# Altium PCB FPOSINDC3.PcbDoc
Units mm, origin at the board's own origin, x right, y up, seen from the top; angles counter-clockwise.
Board outline 70 x 42 mm, 2 copper layers (Top Layer, Bottom Layer), stack 1.571 mm thick; 68 components, 70 nets, 288 pads, 38 vias.
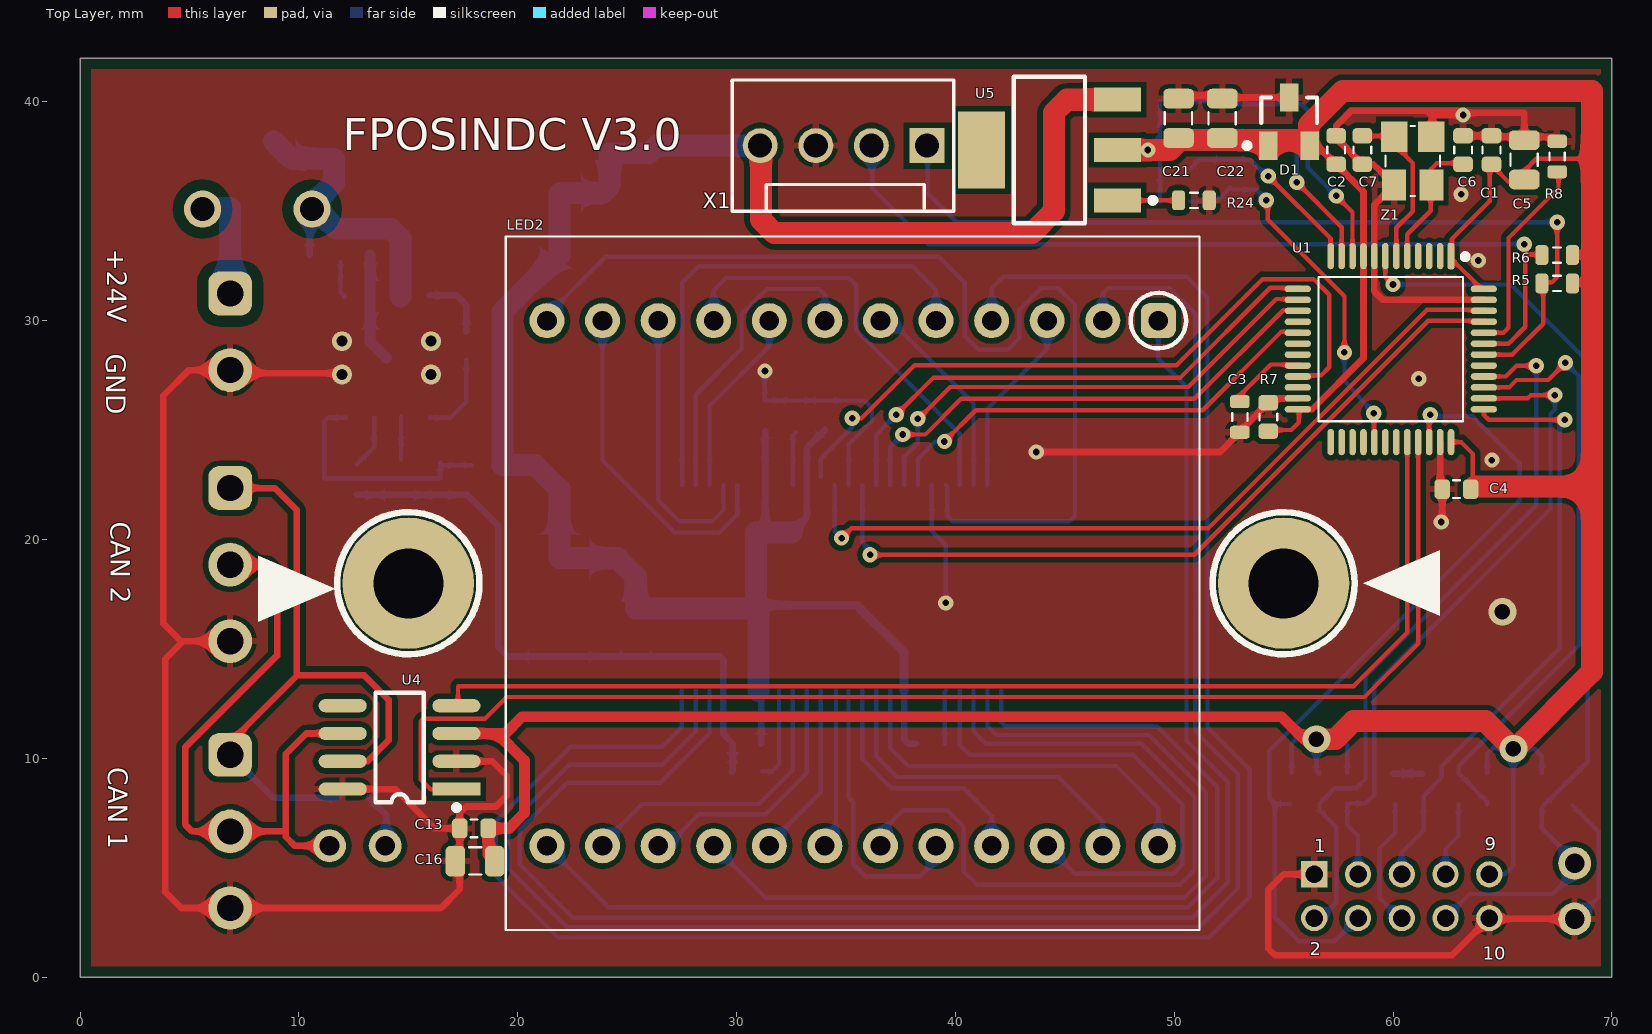
[diagram p0: Top Layer view]
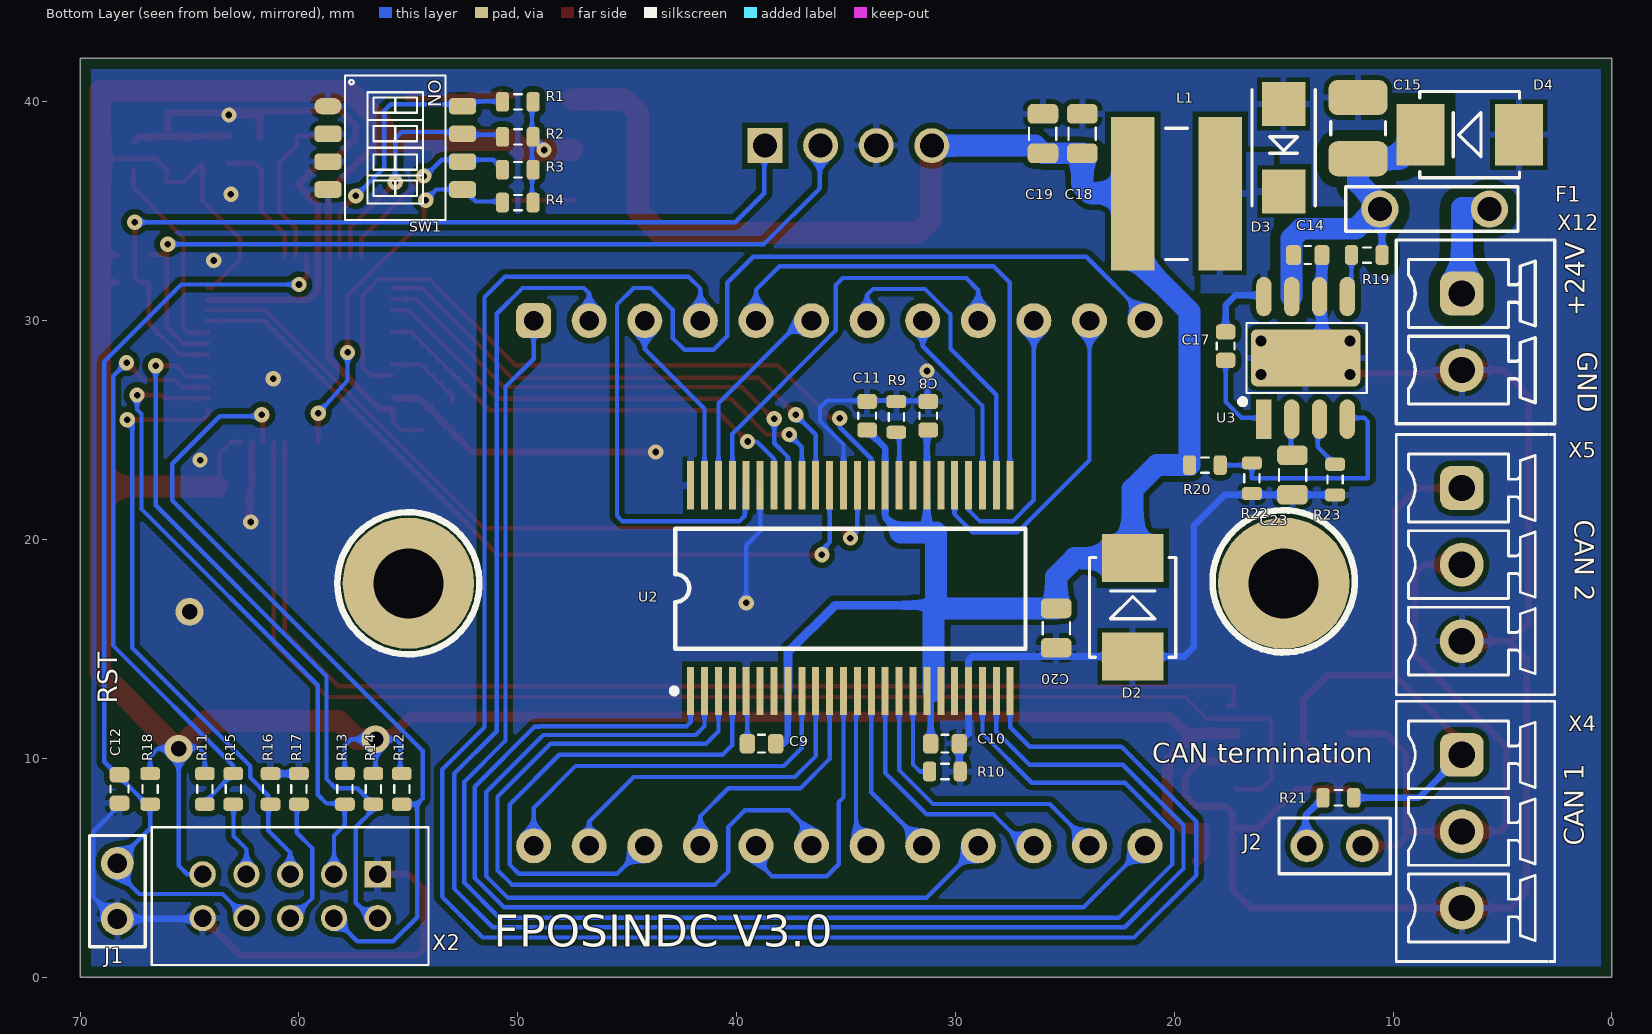
[diagram p1: Bottom Layer view, seen from below]
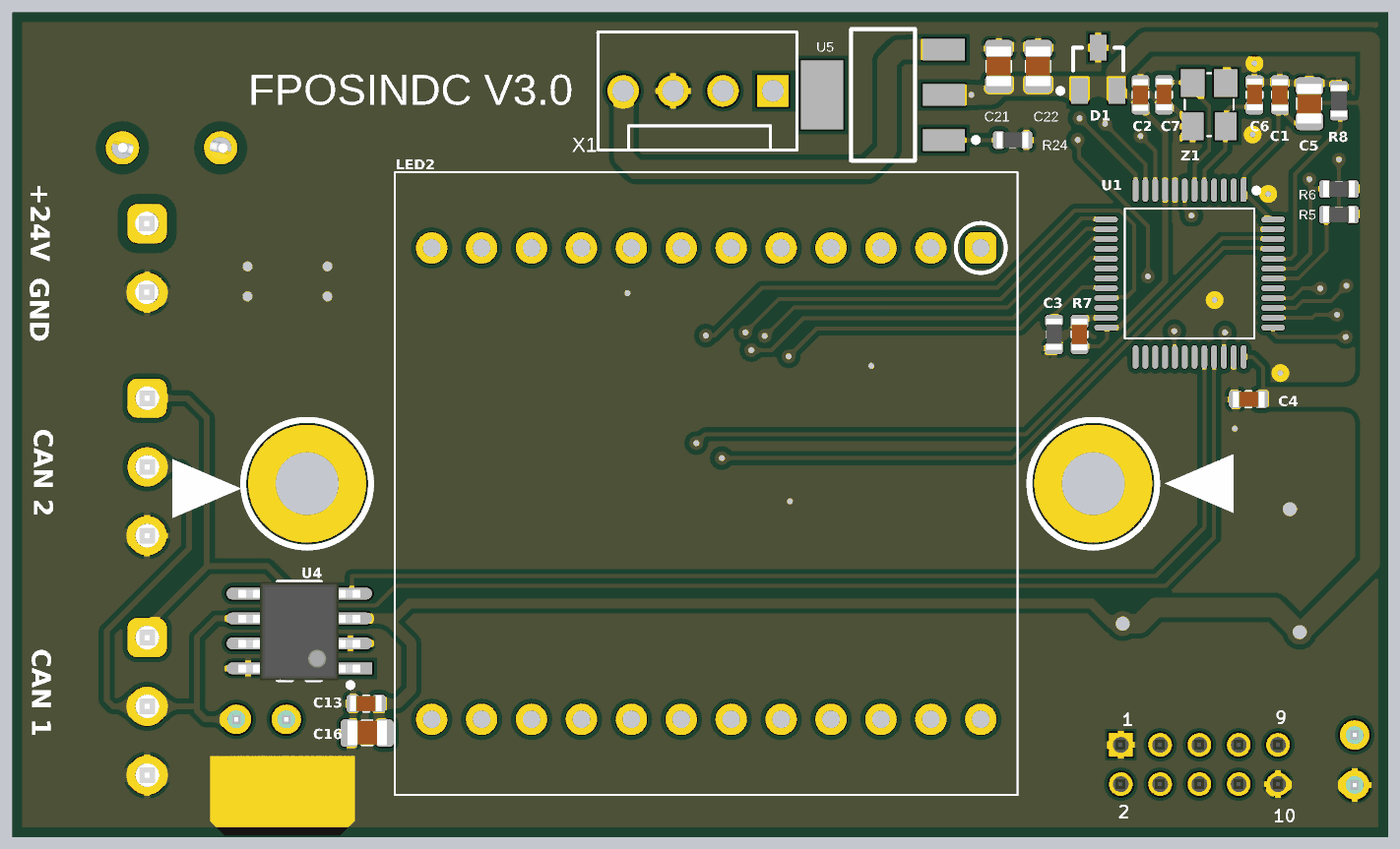
[diagram p2: 3D render of the assembled board from above, using the file's embedded part models]
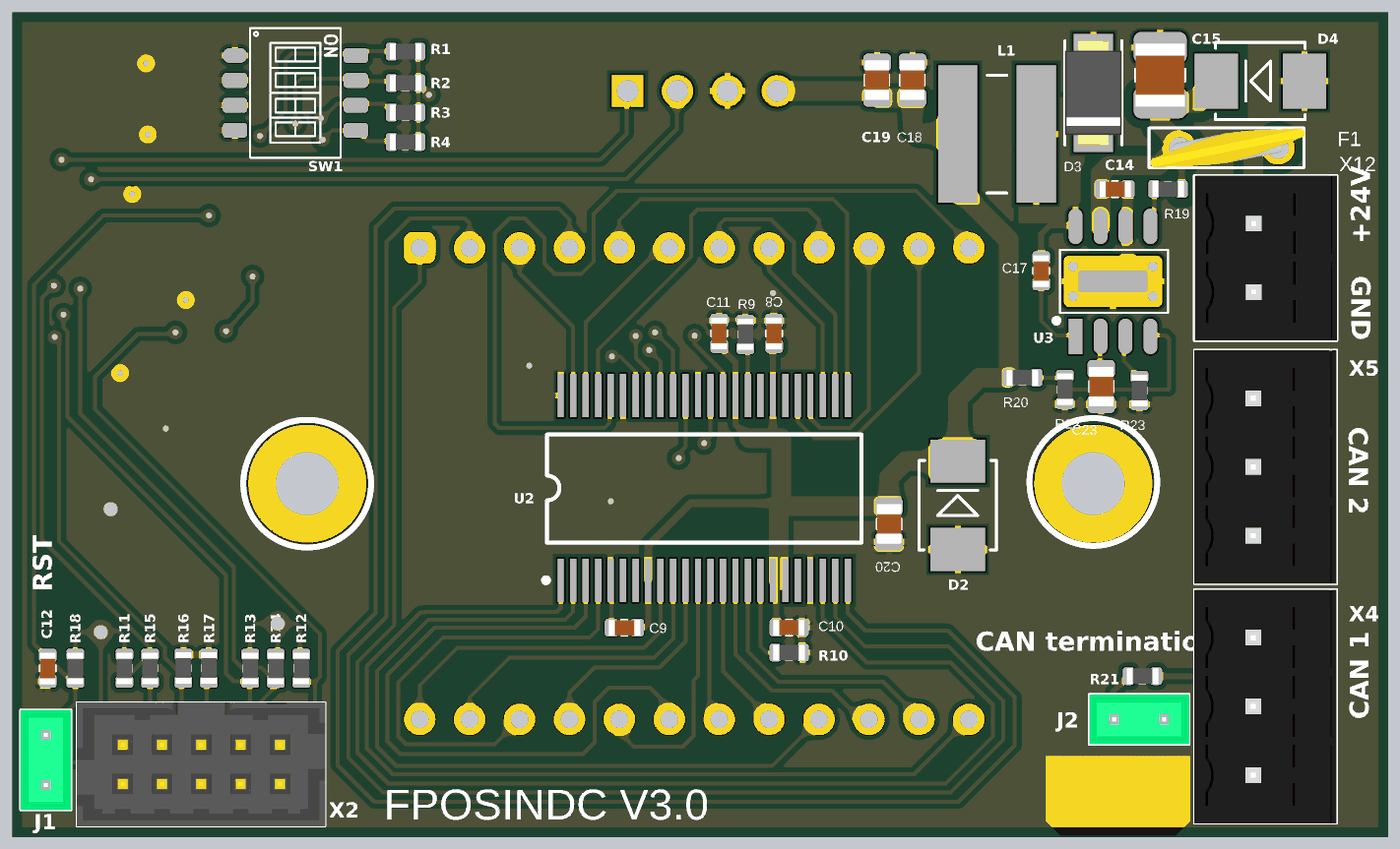
[diagram p3: 3D render of the assembled board from below, using the file's embedded part models]

## Layer stack, top to bottom
Top Solder: solder mask 0.0102, Solder Resist, Dk 3.5
Top Layer: signal copper 0.0356
Dielectric1: core 1.5, FR-4, Dk 4.8
Bottom Layer: signal copper 0.0356
Bottom Solder: solder mask 0.0102, Solder Resist, Dk 3.5

## Board outline
0,0 70.002,0 70.002,42 0.002,42

## Design rules (kind name [scope] priority, off if disabled: settings)
Clearance Clearance_1 [InPolygon vs (OnLayer('Mechanical 2 Layer'))] p1: gap=0.35 ignorepadtopadclearanceinfootprint=FALSE except(0: Arc-Hole Track-Hole SMDPad-Hole THPad-Hole Via-Hole Fill-Hole Poly-Hole Region-Hole Text-Hole)
Clearance PowerVoltage_clearance [InNetClass('PowerVoltage') vs InPoly] p2: gap=0.5 ignorepadtopadclearanceinfootprint=FALSE except(0: Arc-Hole Track-Hole SMDPad-Hole THPad-Hole Via-Hole Fill-Hole Poly-Hole Region-Hole Text-Hole)
Clearance Poly [All vs InPoly] p3: gap=0.25 ignorepadtopadclearanceinfootprint=FALSE except(0: Arc-Hole Track-Hole SMDPad-Hole THPad-Hole Via-Hole Fill-Hole Poly-Hole Region-Hole Text-Hole)
Clearance [All] p4: gap=0.2 ignorepadtopadclearanceinfootprint=FALSE
HoleSize [All] p1: absolutevalues=TRUE maxlimit=5 minlimit=0.15 maxpercent=80.000 minpercent=20.000
MinimumSolderMaskSliver [All] p1: minsoldermaskwidth=0.05
PolygonConnect Polygon_to_via [All vs IsVia] p1: connectstyle=Direct reliefconductorwidth=0.254 reliefentries=4 polygonreliefangle="90 Angle" airgapwidth=0.254
PolygonConnect [All] p2: connectstyle=Relief reliefconductorwidth=0.3 reliefentries=4 polygonreliefangle="90 Angle" airgapwidth=0.2
RoutingVias [All] p1: holewidth=0.3 width=0.5 viastyle="Through Hole" minholewidth=0.3 minwidth=0.5 maxholewidth=1 maxwidth=1.5
SilkToSilkClearance [All] p1: silktosilkclearance=0
SilkToSolderMaskClearance SilkscreenOverComponentPads [IsPad] p1: minsilkscreentomaskgap=0 clearancetoexposedcopper=TRUE
SolderMaskExpansion [All] p1: expansion=0.102 istentingtop=FALSE
Width [All] p1: maxlimit=5 minlimit=0.15 preferedwidth=0.3
26 further rules are at their usual default settings.

## Classes and differential pairs
net class PowerVoltage: NetC14_1 NetF1_1

## Components (designator, comment, footprint, x,y, rotation, side; value= is the part's Value field where it differs from the comment)
C1 "0603B104K500CT" 1608[0603] 64.5,37.8 r270 top value="0.1 uF"
C2 "0603B104K500CT" 1608[0603] 57.4,37.8 r270 top value="0.1 uF"
C3 "0603B104K500CT" 1608[0603] 54.3,25.6 r270 top value="0.1 uF"
C4 "0603B104K500CT" 1608[0603] 62.9,22.3 r0 top value="0.1 uF"
C5 "08053D106KAT2A" 2012[0805] 66,37.3 r270 top value="10 uF"
C6 "CCPF015K0603" 1608[0603] 63.2,37.8 r90 top value="15 pF"
C7 "CCPF015K0603" 1608[0603] 58.6,37.8 r90 top value="15 pF"
C8 "0603B104K500CT" 1608[0603] 31.242,25.654 r270 bottom value="0.1 uF"
C9 "0603B104K500CT" 1608[0603] 38.862,10.668 r180 bottom value="0.1 uF"
C10 "0603B104K500CT" 1608[0603] 30.48,10.668 r0 bottom value="0.1 uF"
C11 "0603B104K500CT" 1608[0603] 34.036,25.654 r270 bottom value="0.1 uF"
C12 "0603B104K500CT" 1608[0603] 68.2,8.6 r270 bottom value="0.1 uF"
C13 "0603B104K500CT" 1608[0603] 18,6.8 r180 top value="0.1 uF"
C14 "CL10B103KC8NNNC" 1608[0603] 13.9,33 r180 bottom value="10 nF"
C15 "GRM32DF51H106ZA01L" 3225[1210] 11.6,38.8 r90 bottom value="10 uF"
C16 "C0805C105K5RACTU" 2012[0805] 18,5.3 r180 top value="1 uF"
C17 "CL10B103KC8NNNC" 1608[0603] 17.651,28.838 r270 bottom value="10 nF"
C18 "08053D106KAT2A" 2012[0805] 24.2,38.5 r270 bottom value="10 uF"
C19 "08053D106KAT2A" 2012[0805] 26,38.5 r270 bottom value="10 uF"
C20 "08053D106KAT2A" 2012[0805] 25.4,16 r90 bottom value="10 uF"
C21 "08053D106KAT2A" 2012[0805] 50.2,39.2 r270 top value="10 uF"
C22 "08053D106KAT2A" 2012[0805] 52.2,39.2 r270 top value="10 uF"
C23 "C0805C105K5RACTU" 2012[0805] 14.6,23 r90 bottom value="1 uF"
D1 "ESDA6V1L" SOT23 54.3,38 r0 top
D2 "SMAJ5.0A-LF" DO-214AA_SMBJ 21.9,16.9 r270 bottom
D3 "15MQ040NTRPBF" SMA 15,37.9 r270 bottom
D4 "SMBJ28A" DO-214AA_SMBJ 6.5,38.5 r180 bottom value="28 V"
F1 "RUEF160" RUE160 8.1,35.1 r0 bottom
J1 "Jumper" HDR1X2V 68.3,5.2 r270 bottom
J2 "Jumper" HDR1X2V 11.4,6 r0 bottom
L1 "NR6028T220M" "NR6028 yuden" 19.9,35.8 r0 bottom value="22 uH"
LED2 "BL-M12A883DUG-11" BL_M12A883DUG-11 35.306,18 r180 top locked
R1 "RL0603K010-1" 0603 50,40 r180 bottom value="10 K"
R2 "RL0603K010-1" 0603 50,38.4 r180 bottom value="10 K"
R3 "RL0603K010-1" 0603 50,36.9 r180 bottom value="10 K"
R4 "RL0603K010-1" 0603 50,35.4 r180 bottom value="10 K"
R5 "RL0603K004.7-1" 0603 67.5,31.7 r180 top value="4.7 K"
R6 "RL0603K004.7-1" 0603 67.5,33 r180 top value="4.7 K"
R7 "RL0603K001-1" 0603 53,25.6 r90 top value="1 K"
R8 "RL0603K001-1" 0603 67.5,37.5 r270 top value="1 K"
R9 "RL0603K010-1" 0603 32.7,25.6 r90 bottom value="10 K"
R10 "RL0603E510-1" 0603 30.48,9.398 r0 bottom value="510 R"
R11 "RL0603K010-1" 0603 64.3,8.6 r270 bottom value="10 K"
R12 "RL0603K010-1" 0603 55.3,8.6 r270 bottom value="10 K"
R13 "RL0603K010-1" 0603 57.9,8.6 r270 bottom value="10 K"
R14 "RL0603K010-1" 0603 56.6,8.6 r270 bottom value="10 K"
R15 "RL0603E100-1" 0603 63,8.6 r270 bottom value="100 R"
R16 "RL0603K010-1" 0603 61.3,8.6 r90 bottom value="10 K"
R17 "RL0603K010-1" 0603 60,8.6 r90 bottom value="10 K"
R18 "RL0603K010-1" 0603 66.8,8.6 r270 bottom value="10 K"
R19 "RC0603FR-07220KL" 0603 11.2,33 r180 bottom value="220 K"
R20 "5.6 K" 0603 18.6,23.4 r0 bottom
R21 "RL0603E120-1" 0603 12.5,8.2 r180 bottom value="120 R"
R22 "2.2 K" 0603 16.451,22.8 r90 bottom
R23 "RC0603FR-0747KL" 0603 12.651,22.738 r90 bottom value="47 K"
R24 "22 R" 0603 50.9,35.5 r180 top
SW1 "MCDHN-04F-T-V" MCDHN-04F-T-V 55.6,37.9 r270 bottom
U1 "STM32F103C4T6A" LQFP-48 59.9,28.7 r270 top
U2 "TLC5920DLG4" DL048 34.798,17.78 r180 bottom locked
U3 "=Value" "SOIC-8 EDP" 14,28.3 r90 bottom
U4 "SN65HVD230QD" SO-8 14.6,10.5 r90 top
U5 "LD1117S33CTR" SOT-223 47.4,35.5 r90 top
X1 "640454-4" "MTA-100 4-pos" 38.7,38 r180 top locked
X2 "87831-1020" "878311020 MGRID WALL HDR" 56.4,4.7 r0 bottom
X4 "MCV1.5/3-G-3.5" mcv1.5-3-g_3.5 6.858,10.16 r0 bottom
X5 "MCV1.5/3-G-3.5" mcv1.5-3-g_3.5 6.858,22.352 r0 bottom
X12 "MCV1.5/2-G-3.5" mcv1.5-2-g_3.5 6.858,31.242 r0 bottom
Z1 "NX3225SA-16.0MHZ" DSX321G 60.9,37.3 r90 top value="16 MHz"

## Footprints (in the part's own frame and the unit in brackets; to place one, negate y for a bottom-side part, rotate by r counter-clockwise, add the part's x,y. Pads: shape width x height; smd on the part's side, far side on the other; paste and mask are expansions set on the pad)
0603 [mm] "Chip Resistor; Body 1.6 x 0.8 mm (LxW typ)"
  rrect50% 0.6x0.9 smd mask+0.06: 1(-0.7,0) 2(0.7,0)
  silkscreen extent -0.18,-0.35 0.18,0.35, body extent -0.79,-0.4 0.81,0.4, height 0.45
1608[0603] [mm] "Chip Capacitor; Body 1.6 x 0.8 mm (LxW typ)"
  rrect50% 0.7x0.9 smd mask+0.05: 1(-0.65,0) 2(0.65,0)
  silkscreen extent -0.15,-0.41 0.15,0.41, body extent -0.79,-0.41 0.81,0.39, height 0.8
2012[0805] [mm] "Chip Capacitor; Body 2.0 x 1.2 mm (LxW typ)"
  rrect50% 0.9x1.4 smd mask+0.07: 1(-0.95,0) 2(0.85,0)
  silkscreen extent -0.33,-0.64 0.23,0.61, body extent -1.05,-0.64 0.95,0.62, height 1.25
3225[1210] [mm] "Chip Capacitor; Body 3.2 x 2.5 mm (LxW typ)"
  rrect50% 1.6x2.7 smd: 1(-1.4,0) 2(1.4,0)
  silkscreen extent -0.3,-1.25 0.3,1.25, body extent -1.6,-1.25 1.6,1.25, height 1.15
"878311020 MGRID WALL HDR" [mm]
  rect 1.2x1.2 hole 0.8: 1(0,0)
  round 1.2 hole 0.8: 2(0,2) 3(2,0) 4(2,2) 5(4,0) 6(4,2) 7(6,0) 8(6,2) 9(8,0) 10(8,2)
  silkscreen extent -2.33,-2.15 10.33,4.15, body extent -2.34,-2.16 10.31,4.14, height 6.4
BL_M12A883DUG-11 [mm] "31.7x31.7mm"
  rrect50% 1.6x1.6 hole 0.9 mask+0.05: 1(-13.97,-12.002)
  round 1.6 hole 0.9 mask+0.05: 2(-11.43,-12.002) 3(-8.89,-12.002) 4(-6.35,-12.002) 5(-3.81,-12.002) 6(-1.27,-12.002) 7(1.27,-12.002) 8(3.81,-12.002) 9(6.35,-12.001) 10(8.89,-12.001) 11(11.43,-12.001) 12(13.97,-12.001) 13(13.97,12.002) 14(11.43,12.002) 15(8.89,12.002) 16(6.35,12.002) 17(3.81,12.002) 18(1.27,12.002) 19(-1.27,12.002) 20(-3.81,12.002) 21(-6.35,12.001) 22(-8.89,12.001) 23(-11.43,12.001) 24(-13.97,12.001)
  silkscreen extent -15.85,-15.85 15.85,15.85, body extent -15.85,-15.85 15.85,15.85, height 8
DL048 [mm] "SSOP; 48 Leads; Body Width 7.5 mm; Pitch 0.635 mm"
  rect 0.32x2.2 smd: 1(-7.302,-4.7) 2(-6.667,-4.7) 3(-6.033,-4.7) 4(-5.398,-4.7) 5(-4.763,-4.7) 6(-4.128,-4.7) 7(-3.493,-4.7) 8(-2.858,-4.7) 9(-2.223,-4.7) 10(-1.588,-4.7) 11(-0.953,-4.7) 12(-0.318,-4.7) 13(0.317,-4.7) 14(0.952,-4.7) 15(1.587,-4.7) 16(2.222,-4.7) 17(2.857,-4.7) 18(3.492,-4.7) 19(4.127,-4.7) 20(4.762,-4.7) 21(5.397,-4.7) 22(6.032,-4.7) 23(6.667,-4.7) 24(7.302,-4.7) 25(7.302,4.7) 26(6.667,4.7) 27(6.033,4.7) 28(5.398,4.7) 29(4.763,4.7) 30(4.128,4.7) 31(3.493,4.7) 32(2.858,4.7) 33(2.223,4.7) 34(1.588,4.7) 35(0.953,4.7) 36(0.318,4.7) 37(-0.317,4.7) 38(-0.952,4.7) 39(-1.587,4.7) 40(-2.222,4.7) 41(-2.857,4.7) 42(-3.492,4.7) 43(-4.127,4.7) 44(-4.762,4.7) 45(-5.397,4.7) 46(-6.032,4.7) 47(-6.667,4.7) 48(-7.302,4.7)
  silkscreen extent -8.18,-4.82 8,2.72
DO-214AA_SMBJ [mm]
  rect 2.2x2.794 smd: 1(-2.248,0) 2(2.248,0)
  silkscreen extent -2.28,-1.97 2.28,1.97, body extent -2.29,-2.03 2.29,2.03, height 2
DSX321G [mm] "SMD Crystal Resonator"
  rect 1.4x1.1 smd: 1(-1.1,-0.85) 4(-1.1,0.85)
  rect 1.4x1.2 smd: 2(1.1,-0.85) 3(1.1,0.85)
  silkscreen extent -1.6,-1.24 1.6,1.24
HDR1X2V [mm]
  round 1.5 hole 0.9: 1(0,0) 2(2.54,0)
  silkscreen extent -1.27,-1.27 3.81,1.27, body extent -1.27,-1.27 3.81,1.27, height 9
LQFP-48 [mm] "48-pin LQFP with Exposed Thermal Pad"
  rrect50% 1.2x0.3 smd mask+0.05: 1(-4.25,2.75)
  oval 1.2x0.3 smd mask+0.05: 2(-4.25,2.25) 3(-4.25,1.75) 4(-4.25,1.25) 5(-4.25,0.75) 6(-4.25,0.25) 7(-4.25,-0.25) 8(-4.25,-0.75) 9(-4.25,-1.25) 10(-4.25,-1.75) 11(-4.25,-2.25) 12(-4.25,-2.75) 25(4.25,-2.75) 26(4.25,-2.25) 27(4.25,-1.75) 28(4.25,-1.25) 29(4.25,-0.75) 30(4.25,-0.25) 31(4.25,0.25) 32(4.25,0.75) 33(4.25,1.25) 34(4.25,1.75) 35(4.25,2.25) 36(4.25,2.75)
  oval 0.3x1.2 smd mask+0.05: 13(-2.75,-4.25) 14(-2.25,-4.25) 15(-1.75,-4.25) 16(-1.25,-4.25) 17(-0.75,-4.25) 18(-0.25,-4.25) 19(0.25,-4.25) 20(0.75,-4.25) 21(1.25,-4.25) 22(1.75,-4.25) 23(2.25,-4.25) 24(2.75,-4.25) 37(2.75,4.25) 38(2.25,4.25) 39(1.75,4.25) 40(1.25,4.25) 41(0.75,4.25) 42(0.25,4.25) 43(-0.25,4.25) 44(-0.75,4.25) 45(-1.25,4.25) 46(-1.75,4.25) 47(-2.25,4.25) 48(-2.75,4.25)
  silkscreen extent -4.35,-3.3 3.3,3.53, body extent -3.5,-3.5 3.5,3.5, height 1.6
MCDHN-04F-T-V [mm]
  oval 0.76x1.25 smd mask+0.05: 1(-1.905,-3.075)
  rrect50% 0.76x1.25 smd mask+0.05: 2(-0.635,-3.075) 3(0.635,-3.075) 4(1.905,-3.075) 5(1.905,3.075) 6(0.635,3.075) 7(-0.635,3.075) 8(-1.905,3.075)
  silkscreen extent -3.3,-2.3 3.3,2.3, body extent -3.35,-2.35 3.35,2.35, height 1.42
mcv1.5-2-g_3.5 [mm] "mcv1.5-2-g_3.5"
  rrect50% 2x2 hole 1.2 mask+0.05: 1(0,0)
  round 2 hole 1.2 mask+0.05: 2(0,3.5)
  silkscreen extent -4.25,-2.45 3,5.95, body extent -4.27,-2.45 2.98,5.95, height 9.2
mcv1.5-3-g_3.5 [mm] "mcv1.5-3-g_3.5"
  rrect50% 2x2 hole 1.2 mask+0.05: 1(0,0)
  round 2 hole 1.2 mask+0.05: 2(0,3.5) 3(0,7)
  silkscreen extent -4.25,-2.45 3,9.45, body extent -4.24,-2.45 3.01,9.45, height 9.2
"MTA-100 4-pos" [mm] "2.54 mm Centerline Friction Lock Header"
  rect 1.6x1.6 hole 1.1: 1(0,0)
  round 1.6 hole 1.1: 2(2.54,0) 3(5.08,0) 4(7.62,0)
  silkscreen extent -1.23,-3 8.92,3, body extent -1.14,-2.92 8.89,2.92, height 10
"NR6028 yuden" [mm]
  rect 2x7 smd: 1(-2,0) 2(2,0)
  silkscreen extent -0.5,-3 0.5,3
RUE160 [mm]
  round 1.7 hole 1.1 mask+0.05: 1(-2.5,0) 2(2.5,0)
  silkscreen extent -3.81,-1.02 4.06,1.02, body extent -4,-1.53 4.14,1.53, height 14.1
SMA [mm]
  rect 2x2 smd: A(-2,0) K(2,0)
  silkscreen extent -2.65,-1.45 2.65,1.45, body extent -2.65,-1.45 2.65,1.45, height 2.55
SO-8 [mm] "Small Outline; 8 Leads; Body Width 3.9 mm; Pitch 1.27 mm"
  rect 0.6x2.2 smd: 1(-1.905,-2.6)
  oval 0.6x2.2 smd: 2(-0.635,-2.6) 3(0.635,-2.6) 4(1.905,-2.6) 5(1.905,2.6) 6(0.635,2.6) 7(-0.635,2.6) 8(-1.905,2.6)
  silkscreen extent -2.88,-2.72 2.5,1.1, body extent -2.51,-3.09 2.49,3.09, height 2.16
"SOIC-8 EDP" [mm] "SOIC-8 EDP Semtech"
  rect 1.8x0.7 smd: 1(-2.8,1.905)
  oval 1.8x0.7 smd: 2(-2.8,0.635) 3(-2.8,-0.635) 4(-2.8,-1.905) 5(2.8,-1.905) 6(2.8,-0.635) 7(2.8,0.635) 8(2.8,1.905)
  rrect20% 2.6x5 smd paste-0.75 mask+0.102: 9(0,0)
  silkscreen extent -2.12,-2.8 1.6,3, body extent -2,-2.5 2,2.5, height 1
SOT23 [mm] "SOT-23; 3 Leads; Body 3.0 x 2.6 mm, inc. leads (LxW max)"
  rect 0.85x1.3 smd: 1(0,0) 2(1.9,0) 3(0.95,2.2)
  silkscreen extent -1.1,-0.12 2.23,2.2, body extent -0.3,1 2.2,2.2, height 1
SOT-223 [mm]
  rect 1.1x2.15 smd: 1(0,0) 2(2.3,0) 3(4.6,0)
  rect 3.5x2.15 smd: 4(2.3,6.2)
  silkscreen extent -1.05,-1.75 5.65,4.72, body extent -1.1,1.4 5.7,4.7, height 1

## Part data
C1 C2 C3 C4 C8 C9 C10 C11 C12 C13: library part CVNF100K0603-25, "0.1 uF, 50V, 10% , X7R,  0603 SMD MLC Capacitor", Manufacturer=WALSIN, PartNum=2496834, Tolerance="± 10%", Voltage=50V, Distributor=Farnell, PartName=0603B104K500CT, Price="0.0062 Euro"
C5: library part GRM21BR60J106KE19L, "10 uF, 25V, X5R, ±10%, 0805", Manufacturer="AVX Corporation", Tolerance=±10%, Voltage=25V, Distributor=TME, PartName=08053D106KAT2A, PartNum=08053D106KAT2A, Price=0.0593
C6 C7: "15 pF, 50V, 5%, NP0, 0603 SMD MLC Capacitor", Manufacturer=Darfon, Tolerance=5%, Voltage="50 V", Distributor=Schukat, PartName=CCPF015K0603, PartNum=CCPF015K0603, Price="0.005 Euro"
C14 C17: library part CVNF010K0603, "10 nF, 100V, 10%, X7R, 0603 SMD MLC Capacitor", Manufacturer=SAMSUNG, Tolerance=±10%, Voltage=100V, Distributor=TME, PartName=CL10B103KC8NNNC, PartNum=CL10B103KC8NNNC, Price=0.00467
C15: "10uF, 50V, 20%, Y5V (F), 1210", Manufacturer="Murata Electronics North America", PartNum=490-1891-1-ND, Tolerance=20%, Voltage=50V, Distributor=DigiKey, PartName=GRM32DF51H106ZA01L, Price=0.95$
C16: library part CVUF001K0805, "1 uF, 50V, 10%, X7R, 0805", Manufacturer=KEMET, PartNum=2118131RL, Tolerance="± 10%", Voltage=50V, Distributor=Farnell, PartName=C0805C105K5RACTU, Price=0.15
C18 C19 C20 C21 C22: library part LMK212F106ZG-T, "10 uF, 25V, X5R, ±10%, 0805", Manufacturer="AVX Corporation", Tolerance=±10%, Voltage=25V, Distributor=TME, PartName=08053D106KAT2A, PartNum=08053D106KAT2A, Price=0.0593
C23: library part GRM21BR71A105KA01L, "1 uF, 50V, 10%, X7R, 0805", Manufacturer=KEMET, PartNum=2118131RL, Tolerance="± 10%", Voltage=50V, Distributor=Farnell, PartName=C0805C105K5RACTU, Price=0.15
D1: "Dual transil array for ESD, 6.1 V, 300 W", Manufacturer=ST, PartNum=511-ESDA6V1L, Distributor=Mouser, PartName=ESDA6V1L, Price=0.19$
D2: "TVS 400W 5.0V Unidirect", Manufacturer=LITTELFUSE, Distributor=TME, PartName=SMAJ5.0A-LF, PartNum=SMAJ5.0A-LF, Price=0.212
D3: library part 15MQ040N, "Schottky Power Rectifier 3A, 40V, SMA", Manufacturer=VISHAY, Distributor=Digi-Key, PartName=15MQ040NTRPBF, PartNum=15MQ040NTRPBF, Price="0.13 Euro"
D4: "DIODE TVS 28V 600W UNI 5% SMD", Manufacturer=Littelfuse, PartNum=SMBJ28ABCT-ND, Distributor=DigiKey, PartName=SMBJ28A, Price=0.18$
F1: "RUEF160 - POLYSWITCH, RADIAL, 1.6A", Manufacturer=RAYCHEM, PartNum=RUEF160-ND, Distributor=Digi-Key, PartName=RUEF160, Price=0.33$
J1 J2: Manufacturer=NINIGI, PartName=JUMPER-B, Distributor=TME, PartNum=JUMPER-B
L1: "22uH, 1.3 A, 0.175 Ohms, +-20%,- 25 C to + 120 C", Manufacturer="Taiyo Yuden", PartNum=587-2103-1-ND, Tolerance=±20%, Distributor=Digi-Key, PartName=NR6028T220M, Price=0.39$
LED2: "DOTMATRIX DISPLAY row catode red/green 8x8 31.7x31.7mm; Imax 30mA", Manufacturer=BetLuxs, Distributor="Farnell, adafru.it/458", PartName=BL-M12A883DUG-11, PartNum=BL-M12A883DUG-11, Price=30.56
R1 R2 R3 R4 R9 R11 R12 R13 R14 R16 R17 R18: "10 K, 1%, 0603, SMD Resistor, Taped", Manufacturer=YAGEO, PartName=RT0603FRE0710KL, PartNum=1500585, Tolerance="± 1%", Voltage=75V, Distributor=Farnell, Price="0.002 Euro"
R5 R6: "4.7 K, 1%, 0603, SMD Resistor, Taped", Manufacturer=Vishay, PartName="4.7 K, 1%, 0603, SMD Resistor", Tolerance=1%, Voltage="75 V", Distributor=Schukat, PartNum=RL0603K004.7-1, Price="0.002 Euro"
R7 R8: "1 K, 1%, 0603, SMD Resistor, Taped", Manufacturer=Vishay, Tolerance=1%, Voltage="75 V", Distributor=Farnell, PartName=RL0603K001-1, PartNum=RL0603K001-1, Price="0.002 Euro"
R10: "510 R, 1%, 0603, SMD Resistor, Taped", Manufacturer=Vishay, PartName="510 R, 1%, 0603, SMD Resistor", Tolerance=1%, Voltage="75 V", Distributor=Schukat, PartNum=RL0603E510-1, Price="0.002 Euro"
R15: "100 R, 1%, 0603, SMD Resistor, Taped", Manufacturer=Vishay, Tolerance=1%, Voltage="75 V", Distributor=Farnell, PartName=RL0603E100-1, PartNum=RL0603E100-1, Price="0.002 Euro"
R19: library part RL0603K220-1_1, "220 K, 1%, 0603, SMD Resistor, Taped", Manufacturer="YAGEO AMERICA CORPORATION", Tolerance=1%, Voltage="75 V", Distributor=Future, PartName=RC0603FR-07220KL, PartNum=RC0603FR-07220KL, Price=0.0017$
R20: library part RL0603K005.6-1, "5.6 K, 1%, 0603, SMD Resistor, Taped", Manufacturer=Vishay, PartName="5.6 K, 1%, 0603, SMD Resistor,", Tolerance=1%, Voltage="75 V", Distributor=Schukat, PartNum=RL0603K005.6-1, Price="0.002 Euro"
R21: "120 R, 1%, 0603, SMD Resistor, Taped", Manufacturer=Vishay, Tolerance=1%, Voltage="75 V", Distributor=Farnell, PartName=RL0603E120-1, PartNum=RL0603E120-1, Price="0.002 Euro"
R22: library part RL0603K002.2-1, "2.2 K, 1%, 0603, SMD Resistor, Taped", Manufacturer=Vishay, PartName="2.2 K, 1%, 0603, SMD Resistor", Tolerance=1%, Voltage="75 V", Distributor=Schukat, PartNum=RL0603K002.2-1, Price="0.002 Euro"
R23: "47 K, 1%, 0603, SMD Resistor, Taped", Manufacturer="YAGEO AMERICA CORPORATION", Tolerance=1%, Voltage="75 V", Distributor=Future, PartName=RC0603FR-0747KL, PartNum=RC0603FR-0747KL, Price="0.002 Euro"
R24: library part RL0603E022-1, "22 R, 1%, 0603, SMD Resistor, Taped", Manufacturer=Vishay, PartName="22 R, 1%, 0603, SMD", Tolerance=1%, Voltage="75 V", Distributor=Schukat, PartNum=RL0603E022-1, Price="0.002 Euro"
SW1: "SWITCH, DIP, SMD, 4 WAY, 1.27mm", Manufacturer=MULTICOMP, PartNum=1605479, Distributor=Farnell, PartName=MCDHN-04F-T-V, Price="0.69 Euro"
U1: "MCU ARM 32BIT 16K FLASH 48-LQFP", Manufacturer=STMicroelectronics, PartNum=497-8316-ND, Distributor=DigiKey, PartName=STM32F103C4T6A, Price=4.81$
U2: "16X8BIT LED DRIVER/CONTRLR, SSOP48", Manufacturer=TI, PartNum=1226302, Distributor=Farnell, PartName=TLC5920DLG4, Price=6.2
U3: library part LM22672MR-ADJ, "SIMPLESWITCH, 1.0A 4.5~42VIN, 8PSOP, Vf 1.285", Manufacturer=TI, PartName=LM22672MR-ADJ/NOPB, PartNum=2323524, Distributor=Farnell, Price=11.16
U4: "3.3-V CAN TRANSCEIVERS SO-8", Manufacturer="Texas Instruments", PartNum=296-13123-5-ND, Distributor=Digi-Key, PartName=SN65HVD230QD, Price=4.3$
U5: "Low drop positive voltage regulator, 3.3 V, 1A, SOT-223", Manufacturer=STMicroelectronics, PartNum=497-1241-1-ND, Distributor=Digi-Key, PartName=LD1117S33CTR, Price=0.59$
X1: "CONN HEADER VERT 4POS .100 TIN", Manufacturer="TE Connectivity", PartNum=A19431-ND, Distributor=Digi-Key, PartName=640454-4, Price=0.14$
X2: "JTAG 2*5 2mm", Manufacturer="Molex/Waldom Electronics Corp", PartNum=WM18560-ND, Distributor=Digi-Key, PartName=87831-1020, Price=0.79$
X4 X5: "HEADER, VERTICAL, 3.5MM, 3WAY", Manufacturer="PHOENIX CONTACT", PartName=1843619, PartNum=3704828, Distributor=Farnell, Price=1.77
X12: "HEADER, VERTICAL, 3.5MM, 2WAY", Manufacturer="PHOENIX CONTACT", PartName=1843606, PartNum=3704816, Distributor=Farnell, Price=1.02
Z1: "16 MHz, 8 pF, +-15 ppm, -10..+75 С", Manufacturer=NDK, PartNum=644-1049-1-ND, Tolerance="15 ppm", Distributor=DigiKey, PartName=NX3225SA-16.0MHZ, Price=1$

## Free pads (board coordinates)
  round 6 hole 3.2 mask+0.05: ""(15,18) ""(55,18)

## Via types
v1: diameter 0.7, hole 0.3, Top Layer to Bottom Layer, tented both sides, 26 vias
v2: diameter 0.7, hole 0.3, Top Layer to Bottom Layer, 5 vias
v3: diameter 0.9, hole 0.5, Top Layer to Bottom Layer, tented both sides, 4 vias
v4: diameter 1.27, hole 0.711, Top Layer to Bottom Layer, tented both sides, 3 vias

## Nets (pads, with @x,y where several pads share a name; then routed paths per layer and width w, separated by ;. In a path a pad name is that pad's centre, name@x,y a point inside that pad or via, vN(x,y) a via of type N, cw(c..) or ccw(c..) an arc to the next point about the centre after c; other vN are vias at no path point)
+3V3: C1.2 C2.2 C3.2 C4.2 C5.2 C13.1 C16.1 C21.2 C22.2 D1.1 D1.2 R1.2 R2.2 R3.2 R4.2 R5.1 R6.1 R11.1 R12.1 R13.1 R14.1 R18.1 U1.1 U1.9 U1.24 U1.36 U1.48 U4.3 U5.2 X2.9 | length 175.3
  Top Layer w0.2: C3.2@54.356,25.004 55.344,25.004 55.7,25.36 U1.24@55.7,25.95 ; U1.36 63.11,24.45 63.65,23.91 C4.2@63.65,22.5 ; U1.48@64.15,31.5 64,31.5 62.7,32.8 62.7,33.744 64.42,35.464 64.42,37.196 65.278,36.338 66.04,36.338 66.04,36.892 66.548,37.4 69.088,37.4 ; R5.1@68.264,31.75 69.088,31.75 ; R6.1@68.264,33.02 69.088,33.02
  Top Layer w0.3: U1.24@55.7,25.95 56.307,25.95 58.65,28.293 U1.9 58.65,35.9 C2.2 56.55,38 D1.2 D1.2@56.15,38
  Top Layer w0.5: U4.3 U4.3@17.248,11.135 ; U4.3@17.257,11.144 U4.3@17.248,11.135 ; C16.1 18.65,5.6 C13.1 19.6,6.8 20.3,7.5 20.3,9.902 19.067,11.135 ; v4(56.5,10.874) 55.928,10.874 54.902,11.9 20.2,11.9 19.435,11.135 19.067,11.135 ; U4.3@17.248,11.135 19.067,11.135
  Top Layer w1: U5.2@47.5,37.8 49.8,37.8 50.25,38.25 D1.2@55.9,38.25 ; D1.2@56.15,38 56.15,38.95 57.7,40.5 69.088,40.5 69.088,37.4 69.088,33.02 69.088,31.75 69.088,22.414 ; v4(56.5,10.874) 57.356,10.874 58.182,11.7 64.225,11.7 v4@65.5,10.425 ; C4.2@63.736,22.414 69.088,22.414 ; v4(65.5,10.439) v4@65.5,10.425 ; v4@65.5,10.425 65.532,10.393 69.088,13.949 69.088,22.414
  Bottom Layer w0.2: v1(48.8,37.8) 48.8,37.9 R2.2 ; R4.2@49.352,35.449 R1.2@49.352,40.021 ; R12.1@55.372,9.336 55.372,10.672 55.574,10.874 v4(56.5,10.874) ; R14.1 56.5,9.4 v4(56.5,10.874) ; R14.1@56.639,9.339 R14.1@56.642,9.336 ; R13.1@57.912,9.336 57.912,10.588 57.626,10.874 v4(56.5,10.874) ; R11.1@64.3,9.309 64.3,10.2 64.6,10.5 65.5,10.5 v4(65.5,10.439) ; X2.9@64.5,4.5 64.7,4.7 65.1,4.7 65.5,5.1 v4(65.5,10.439) ; R18.1@66.8,9.309 66.8,10.1 66.461,10.439 v4(65.5,10.439)
AG1: LED2.24 U2.9 | length 17.7
  Bottom Layer w0.2: U2.9 37.02,10.477 37.846,9.652 47.358,9.652 49.276,7.734 LED2.24
AG2: LED2.21 U2.11 | length 11.5
  Bottom Layer w0.2: U2.11 35.75,9.97 37.084,8.636 40.386,8.636 41.656,7.366 LED2.21
AG3: LED2.18 U2.13 | length 7.3
  Bottom Layer w0.2: LED2.18 34.544,6.506 U2.13@34.544,13.08
AG4: LED2.15 U2.15 | length 11.9
  Bottom Layer w0.2: LED2.15 26.826,5.998 28.278,7.45 31.33,7.45 33.21,9.33 U2.15
AG5: LED2.1 U2.22 | length 75
  Bottom Layer w0.2: U2.22 28.765,11.135 26.518,8.888 22.253,8.888 20.1,6.734 20.1,5.15 22.53,2.72 50.85,2.72 52.45,4.32 52.45,8.92 50.56,10.81 50.56,26.98 49.276,28.264 LED2.1
AG6: LED2.4 U2.24 | length 90.9
  Bottom Layer w0.2: U2.24 27.495,11.426 26.6,10.53 22.417,10.53 19,7.113 19,4.65 21.84,1.81 51.6,1.81 53.46,3.67 53.46,9.48 51.52,11.42 51.52,31.07 50.586,32.004 42.194,32.004 41.656,31.466 LED2.4
AG7: LED2.7 U2.26 | length 14.3
  Bottom Layer w0.2: U2.26 28.13,26.621 30.226,28.716 30.226,30.287 31.389,31.45 33.77,31.45 34.036,31.184 LED2.7
AG8: LED2.10 U2.28 | length 12.9
  Bottom Layer w0.2: LED2.10 26.416,21.809 27.397,20.828 28.878,20.828 29.4,21.351 U2.28
AR1: LED2.23 U2.10 | length 15.7
  Bottom Layer w0.2: U2.10 36.375,13.069 36.375,10.107 37.338,9.144 44.704,9.144 46.736,7.112 LED2.23
AR2: LED2.20 U2.12 | length 13
  Bottom Layer w0.2: U2.12 35.115,8.213 35.33,7.999 35.33,5.162 35.886,4.606 38.388,4.606 39.116,5.334 LED2.20
AR3: LED2.17 U2.14 | length 8.1
  Bottom Layer w0.2: LED2.17 31.496,6.096 33.846,8.445 U2.14
AR4: LED2.14 U2.16 | length 13.8
  Bottom Layer w0.2: LED2.14 23.876,6.096 25.69,7.91 31.024,7.91 32.575,9.461 U2.16
AR5: LED2.2 U2.23 | length 82.5
  Bottom Layer w0.2: U2.23 28.13,11.231 26.61,9.71 22.35,9.71 19.58,6.94 19.58,4.96 22.26,2.28 51.14,2.28 52.91,4.05 52.91,9.29 50.96,11.24 50.96,30.32 49.784,31.496 46.986,31.496 46.736,31.246 LED2.2
AR6: LED2.5 U2.25 | length 23
  Bottom Layer w0.2: U2.25 27.516,22.501 27.516,31.746 28.26,32.49 38.04,32.49 39.116,31.414 LED2.5
AR7: LED2.8 U2.27 | length 8.7
  Bottom Layer w0.2: U2.27 28.765,26.106 31.496,28.836 LED2.8
AR8: LED2.11 U2.29 | length 15.6
  Bottom Layer w0.2: LED2.11 23.876,23.622 27.178,20.32 29.21,20.32 30.035,21.145 U2.29
BOOT0: R8.2 U1.44 | length 9.4
  Top Layer w0.2: U1.44 65.05,29.45 65.278,29.678 65.278,33.778 67.564,36.064 R8.2@67.564,36.892
C1: LED2.22 U2.4 | length 23.4
  Bottom Layer w0.2: U2.4 40.195,10.604 40.64,10.16 48.1,10.16 50.376,7.884 50.376,5.146 49.96,4.73 45.464,4.73 LED2.22
C2: LED2.19 U2.3 | length 34.8
  Bottom Layer w0.2: LED2.19 36.576,6.604 37.592,7.62 39.624,7.62 40.386,6.858 40.386,4.826 40.982,4.23 50.27,4.23 50.93,4.89 50.93,8.24 49.36,9.81 48.502,10.668 41.402,10.668 40.831,11.239 U2.3
C3: LED2.16 U2.2 | length 40.6
  Bottom Layer w0.2: LED2.16 31.334,3.62 50.45,3.62 51.45,4.62 51.45,8.45 48.832,11.068 41.872,11.068 41.465,11.475 U2.2
C4: LED2.13 U2.1 | length 49
  Bottom Layer w0.2: LED2.13 24.134,3.2 50.64,3.2 51.97,4.53 51.97,8.7 49.22,11.45 49.016,11.45 48.998,11.468 42.292,11.468 42.1,11.659 U2.1
C5: LED2.3 U2.47 | length 8.7
  Bottom Layer w0.2: U2.47 41.465,25.971 44.196,28.702 LED2.3
C6: LED2.6 U2.46 | length 9.6
  Bottom Layer w0.2: LED2.6 37.055,30.001 40.831,26.226 U2.46
C7: LED2.9 U2.45 | length 19.4
  Bottom Layer w0.2: LED2.9 28.956,31.396 29.51,31.95 35.15,31.95 35.476,31.624 35.476,29.546 40.195,24.826 U2.45
C8: LED2.12 U2.44 | length 48
  Bottom Layer w0.2: LED2.12 21.336,30.236 24.02,32.92 39.24,32.92 40.425,31.735 40.425,29.3 41.057,28.668 42.384,28.668 42.926,29.21 42.926,30.501 43.921,31.496 44.704,31.496 45.466,30.734 45.466,21.082 45.212,20.828 39.878,20.828 39.624,21.082 39.624,22.417 U2.44
CAN_RX: U1.32 U4.4 | length 54.4
  Top Layer w0.2: U4.4@17.553,12.405 U4.4 17.272,12.477 17.272,13.3 58.2,13.3 60.65,15.75 U1.32
CAN_TX: U1.33 U4.1 | length 60.7
  Top Layer w0.2: U4.1 16.005,8.595 15.57,9.03 15.57,11.688 15.687,11.805 18.505,11.805 19.5,12.8 58.7,12.8 61.15,15.25 U1.33
CSEL0: U1.45 U2.38 | length 35.9
  Top Layer w0.2: v1(36.1,19.3) 50.914,19.3 61.614,30 U1.45@64.25,30
  Bottom Layer w0.2: U2.38 35.75,19.875 36.1,19.526 v1(36.1,19.3)
CSEL1: U1.46 U2.36 | length 36.3
  Top Layer w0.2: v1(34.798,20.066) 35.252,20.52 51.568,20.52 61.548,30.5 U1.46@64.25,30.5
  Bottom Layer w0.2: U2.36 34.48,20.383 v1(34.798,20.066)
CSEL2: U1.21 U2.35 | length 32.8
  Top Layer w0.2: v1(35.29,25.54) 35.71,25.54 38.14,27.97 50.12,27.97 54.05,31.9 56.366,31.9 57.08,31.186 57.08,27.87 56.71,27.5 U1.21@55.75,27.5
  Bottom Layer w0.2: U2.35@33.846,22.86 33.846,23.685 35.29,25.13 v1(35.29,25.54)
DSEL: R9.1 U2.33 | length 2.5
  Bottom Layer w0.2: U2.33 32.575,24.775 R9.1
GND: C1.1 C2.1 C3.1 C4.1 C5.1 C6.2 C7.1 C8.1 C9.1 C10.1 C11.1 C12.2 C13.2 C14.2 C15.2 C16.2 C18.1 C19.1 C20.1 C21.1 C22.1 C23.1 D1.3 D2.2 D3.A D4.2 J1.2 R7.1 R8.1 R9.2 R10.1 R16.2 R17.2 R22.1 R23.1 R24.1 SW1.1 SW1.2 SW1.3 SW1.4 U1.8 U1.23 U1.35 U1.47 U2.5 U2.21 U2.37 U2.43 U2.48 U3.6 U3.9 U4.2 U4.8 X1.3 X2.1 X2.10 X4.3 X5.3 X12.2 Z1.2 Z1.4 | length 200.6
  Top Layer w0.3: X5.3 4.702,15.352 ; v3(11.968,27.538) 11.906,27.6 7,27.6 X12.2 4.972,27.742 3.8,26.57 3.8,16.16 4.608,15.352 4.702,15.352 ; U4.8 14.405,8.595 16.2,6.8 C13.2 ; U4.2 18.835,9.865 19.5,9.2 19.5,8.3 19,7.8 17.65,7.8 17.35,7.5 C13.2 ; v1(43.7,24) 52.1,24 R7.1 53,24.95 C3.1 54.5,26.45 U1.23 ; C21.1@50.2,40.3 52.2,40.3 52.3,40.2 D1.3@55.05,40.2 ; X2.1 55,4.7 54.3,4 54.3,1.3 54.6,1 62.7,1 X2.10 64.44,2.66 J1.2 J1.2@68.4,2.66 ; Z1.2 61.8,38.45 61.8,39.6 ; U1.35 62.15,22.4 C4.1 62.25,20.85 v1(62.2,20.8) ; C6.2 C1.1 ; v2(63.2,39.4) 62,39.4 61.8,39.6 ; U1.47 59.54,30.95 59.15,31.34 U1.8 59.15,35.3 Z1.4 59.1,37.15 C7.1 57.4,38.35 C2.1 57.4,38.9 58.1,39.6 61.8,39.6 ; C1.1@64.55,38.4 C5.1@66,38.4 ; R8.1 67.3,38.4 C5.1@66,38.4 ; 4.702,15.352 3.9,14.55 3.9,3.88 4.62,3.16 X4.3 16.49,3.16 17.35,4.02 C13.2 ; 61.8,39.6 63.1,39.6 63.2,39.5 66,39.5 66,38.5 65.95,38.45 C5.1@66,38.4
  Bottom Layer w0.2: v1(31.3,27.7) 31.29,27.69 31.29,26.352 34.036,26.352 35.854,26.352 36.188,26.018 36.188,25.418 35.115,24.346 U2.37 ; U2.43 38.925,20.375 39.56,19.74 v1(39.56,17.1) ; C9.1 39.512,13.032 U2.5 ; C12.2@68.2,7.85 69.4,6.65 69.4,3.66 J1.2@68.4,2.66
  Bottom Layer w0.3: R23.1 17.702,22.038 19.1,20.64 19.1,15.1 19.548,14.652 D2.2 29.248,14.652 29.4,14.499 U2.21 29.4,11.097 C10.1 29.83,9.448 R10.1 ; v1@43.62,24 v1(43.7,24) ; R17.2 R16.2 ; v2(61.175,27.35) v2@61.225,27.4 ; X2.10 64.44,2.66 J1.2 J1.2@68.4,2.66
  Bottom Layer w0.5: C14.2 13.25,29.05 U3.9
  other v2: 64.52,23.63 63.9,32.75 63.11,35.78
  other v3: 16.032,27.538 11.968,29.062 16.032,29.062
  other v4: 65,16.7
LE: U1.14 U2.41 | length 23
  Top Layer w0.2: v1(38.28,25.52) 38.32,25.52 39.77,26.97 50.64,26.97 54.658,30.988 U1.14@55.738,30.988
  Bottom Layer w0.2: U2.41 37.655,23.775 38.28,24.4 v1(38.28,25.52)
NetC6_1: C6.1 U1.5 Z1.1 | length 6
  Top Layer w0.2: U1.5 60.65,33.95 61.722,35.022 61.722,36.912 62.006,37.196 C6.1@63.246,37.196
NetC7_2: C7.2 U1.6 Z1.3 | length 7.6
  Top Layer w0.2: C7.2@58.674,38.496 58.732,38.438 60.11,38.438 60.11,37.99 60.9,37.2 60.9,34.992 60.15,34.242 U1.6
NetC14_1: C14.1 C15.1 D4.1 F1.2 R19.2 U3.7 | length 15.3
  Bottom Layer w0.3: R19.2 10.5,35.2 F1.2@10.6,35.3
  Bottom Layer w1: D4.1@8.848,38.2 9.648,37.4 C15.1 11.6,36.3 10.6,35.3 11.7,34.2 14.2,34.2 14.635,33.765 U3.7
NetC17_1: C17.1 D3.K L1.1 U3.8 | length 3.1
  Bottom Layer w0.3: U3.8@15.986,31.158 17.206,31.158 17.651,30.713 C17.1
NetC17_2: C17.2 U3.1 | length 3.9
  Bottom Layer w0.2: U3.1@15.986,25.558 16.921,25.558 17.651,26.288 C17.2
NetC23_2: C23.2 U3.2 | length 2
  Bottom Layer w0.2: C23.2@14.666,23.638 U3.2@14.666,25.608
NetF1_1: F1.1 X12.1 | length 5.2
  Bottom Layer w1: F1.1 5.658,35.158 6.858,35.158 X12.1
NetJ2_1: J2.1 U4.6 X4.2 X5.2 | length 29.2
  Top Layer w0.3: X5.2 8.588,18.852 9,18.44 9,14.7 4.8,10.5 4.8,6.98 5.12,6.66 X4.2 9.4,6.66 ; J2.1 9.82,6 9.4,6.42 9.4,6.66 ; U4.6 10.335,11.135 9.4,10.2 9.4,6.66
NetJ2_2: J2.2 R21.1 | length 2.6
  Bottom Layer w0.3: R21.1 14,7.4 14,6.06 J2.2
NetR7_2: R7.2 U1.20 | length 3.6
  Top Layer w0.2: R7.2 53,26.584 54.416,28 U1.20@55.75,28
NetR10_2: R10.2 U2.17 | length 4.3
  Bottom Layer w0.2: R10.2 31.623,9.398 31.941,9.716 U2.17
NetR15_2: R15.2 X2.7 | length 3.5
  Bottom Layer w0.2: X2.7 62.4,5.855 62.992,6.447 62.992,7.901 R15.2@63,7.909
NetR17_1: R17.1 X2.6 | length 6.2
  Bottom Layer w0.2: R17.1@60.1,7.909 60.1,6.6 59.4,5.9 59.4,3.6 X2.6@60.5,2.5
NetR19_1: R19.1 U3.5 | length 1.7
  Bottom Layer w0.2: R19.1@11.9,32.7 11.9,31.295 U3.5
NetR20_1: R20.1 R22.2 U3.4 | length 11.2
  Bottom Layer w0.2: U3.4@12.176,25.558 11.318,25.558 11.151,25.391 11.151,22.8 16.451,22.8 R22.2 16.551,23.4 R20.1
NetR21_2: R21.2 U4.7 X4.1 X5.1 | length 31.1
  Top Layer w0.3: X5.1 8.898,22.352 9.9,21.35 9.9,13.8 ; X4.1@7.153,9.865 X4.1 6.858,10.733 9.9,13.775 9.9,13.8 ; U4.7 12.048,9.865 13.013,9.865 13.14,9.865 14.1,10.825 14.1,12.675 12.975,13.8 9.9,13.8
  Bottom Layer w0.3: X4.1 8.818,8.2 R21.2
NetR23_2: R23.2 U3.3 | length 2.4
  Bottom Layer w0.2: R23.2 13.446,24.233 U3.3@13.446,25.558
NetR24_2: R24.2 U5.1 | length 2.8
  Top Layer w0.2: U5.1 R24.2
NRST: C12.1 J1.1 R18.2 U1.7 X2.8 | length 44.2
  Top Layer w0.2: U1.7@59.65,33 U1.7 59.65,32.004 v1(60,31.653)
  Bottom Layer w0.2: v1(60,31.653) 65.375,31.653 68.895,28.133 68.895,9.845 66.8,7.75 66.8,6.8 J1.1@68.4,5.2 ; X2.8@62.5,2.5 62.5,2.8 63.5,3.8 67.3,3.8 68.58,5.08 68.58,5.334 J1.1@68.326,5.588
OE: U1.13 U2.39 | length 24.5
  Top Layer w0.2: v1(37.3,25.7) 39,27.4 50.29,27.4 54.39,31.5 U1.13@55.75,31.5
  Bottom Layer w0.2: U2.39 36.386,24.786 v1(37.3,25.7)
S1: R1.1 SW1.8 U1.10 | length 13
  Top Layer w0.2: v1(57.4,35.7) 58.15,34.95 U1.10
  Bottom Layer w0.2: R1.1@50.752,40.021 52.438,40.021 52.565,39.894 55.806,39.894 56.1,39.6 56.1,37 v1(57.4,35.7)
S2: R2.1 SW1.7 U1.11 | length 11.2
  Top Layer w0.2: v1(55.6,36.325) 57.65,34.275 U1.11
  Bottom Layer w0.2: R2.1@50.752,38.497 52.438,38.497 52.565,38.624 55.301,38.624 55.6,38.325 v1(55.6,36.325)
S3: R3.1 SW1.6 U1.12 | length 8.9
  Top Layer w0.2: v1(54.3,36.61) 54.3,36.604 57.15,33.754 U1.12
  Bottom Layer w0.2: R3.1@50.752,36.973 51.133,37.354 53.471,37.354 54.216,36.61 v1(54.3,36.61)
S4: R4.1 SW1.5 U1.29 | length 17
  Top Layer w0.2: v1(54.208,35.509) 54.275,35.442 54.275,34.625 57.78,31.12 v1(57.78,28.55) ; U1.29@59.125,24.425 v1(59.125,25.765)
  Bottom Layer w0.2: R4.1@50.752,35.449 51.93,35.449 52.565,36.084 52.654,35.995 53.722,35.995 v1(54.208,35.509) ; v1(57.78,28.55) 57.78,27.266 v1(59.125,25.765)
SCL: R5.2 U1.42 X1.1 | length 40
  Top Layer w0.2: U1.42 65.45,28.45 66.864,29.864 66.864,31.75 67.25,31.75 67.5,32 v1(67.5,34.5)
  Bottom Layer w0.2: X1.1@38.735,38.1 38.735,35.825 40.06,34.5 v1(67.5,34.5)
SDA: R6.2 U1.43 X1.2 | length 39.7
  Top Layer w0.2: U1.43 65.272,28.95 66.04,29.718 66.04,33.02 ; v1(66,33.5) 66.04,33.46 66.04,33.02 ; R6.2@66.864,33.02 66.04,33.02
  Bottom Layer w0.2: X1.2@36.195,38.1 36.195,36.055 38.75,33.5 v1(66,33.5)
SPI_MOSI: U1.17 U2.42 | length 21.1
  Top Layer w0.2: v1(39.5,24.48) 40.928,25.908 51.308,25.908 54.9,29.5 U1.17@55.75,29.5
  Bottom Layer w0.2: U2.42 38.291,23.69 39.08,24.48 v1(39.5,24.48)
SPI_SCK: U1.15 U2.40 | length 23
  Top Layer w0.2: v1(37.6,24.8) 37.72,24.8 37.721,24.799 38.63,24.799 40.261,26.43 50.93,26.43 54.98,30.48 U1.15@55.73,30.48
  Bottom Layer w0.2: U2.40 37.022,22.482 37.022,24.222 v1(37.6,24.8)
TCK: R16.1 U1.37 X2.5 | length 27.9
  Top Layer w0.2: U1.37 64.15,25.69 64.373,25.467 v1(67.845,25.467)
  Bottom Layer w0.2: X2.5 60.4,5.7 61.4,6.7 61.4,8.294 62.23,9.124 62.23,9.652 67.614,15.036 67.614,25.236 v1(67.845,25.467)
TDI: R13.2 U1.38 X2.3 | length 30
  Top Layer w0.2: U1.38 66.15,26.45 66.3,26.6 v1(67.4,26.6)
  Bottom Layer w0.2: X2.3 58.4,6.465 57.912,6.953 57.912,7.936 58.736,7.936 59.14,8.34 59.14,13.34 67.214,21.414 67.195,21.433 67.195,25.737 67.4,25.942 v1(67.4,26.6) ; X2.3@58.5,4.5 X2.3@58.5,4.7
TDO: R11.2 R15.1 U1.39 | length 27.4
  Top Layer w0.2: U1.39 65.304,26.95 65.644,27.29 67.09,27.29 v1(67.88,28.08)
  Bottom Layer w0.2: R11.2@64.3,7.909 64.3,8.009 63,9.309 63,9.66 68.495,15.155 68.495,27.465 v1(67.88,28.08)
TMS: R12.2 U1.34 X2.4 | length 37.3
  Top Layer w0.2: U1.34 61.65,25.65 v1(61.7,25.7)
  Bottom Layer w0.2: R12.2 55.287,7.913 54.6,7.913 ; X2.4@58.5,2.5 58.2,2.5 57.34,1.64 55.7,1.64 54.6,2.74 54.6,7.913 ; v1(61.7,25.7) 61.7,25.632 63.618,25.632 65.786,23.464 65.786,21.786 54.35,10.35 54.35,8.163 54.6,7.913
TRST: R14.2 U1.40 X2.2 | length 33.4
  Top Layer w0.2: U1.40 65.15,27.45 65.64,27.94 v1(66.548,27.94)
  Bottom Layer w0.2: X2.2@56.5,2.5 57.4,3.4 57.4,6.862 56.642,7.62 56.642,7.936 57.342,8.636 58.322,8.636 58.74,9.054 58.74,13.756 66.548,21.564 v1(66.548,27.94)
UART1_RX: U1.31
UART1_TX: U1.30
VLED: C8.2 C9.2 C10.2 C11.2 C18.2 C19.2 C20.2 D2.1 L1.2 R20.2 U2.8 U2.18 U2.19 U2.31 U2.34 U5.3 X1.4 | length 101
  Top Layer w1: X1.4@31.115,38.1 31.115,34.615 31.73,34 43.5,34 44.5,35 44.5,39.5 45.1,40.1 U5.3 U5.3@47.5,40.1
  Bottom Layer w0.3: U2.19 31,13.08 U2.18@31.178,13.08 ; C10.2 31.13,12.904 U2.18 ; 31.305,20.32 U2.31 C8.2@31.305,24.941 ; 32.512,20.32 33.21,21.018 U2.34 33.21,24.179 C11.2 ; U2.8 37.655,10.858 37.846,10.668 C9.2
  Bottom Layer w0.4: 31,17 35.5,17 37.655,14.844 U2.8
  Bottom Layer w1: 30.886,20.32 30.886,17.018 30.718,16.85 C20.2 25.4,18.3 24.552,19.148 D2.1 21.9,22.3 20.8,23.4 R20.2 19.3,30.4 21.9,33 L1.2 21.93,35.83 23.86,35.83 24.2,36.17 C18.2 C19.2 26.35,38 30.872,38 X1.4@30.872,37.857 ; 31,13.08 31,17 ; X1.4 30.872,37.792 X1.4@30.872,37.857 ; X1.4@31.115,38.1 X1.4@30.872,37.857 ; 31.305,20.32 32.512,20.32
pads on no net: U1.2 U1.3 U1.4 U1.16 U1.18 U1.19 U1.22 U1.25 U1.26 U1.27 U1.28 U1.41 U2.6 U2.7 U2.20 U2.30 U2.32 U4.5 U5.4

## Polygon pours and split planes (outlines as drawn)
GND on Top Layer "GND" (solid, remove dead copper, pour order 1002): 0.5,0.5 0.5,41.5 69.5,41.5 69.5,0.5
NetC17_1 on Bottom Layer "SW_BOT" (solid, pour order 5): 15.45,31.25 18.637,31.25 18.8,31.25 18.8,37.7 15.45,37.7
GND on Bottom Layer "GND" (solid, remove dead copper, pour order 1001): 0.5,0.5 0.5,41.5 69.5,41.5 69.5,0.5

## Silkscreen, mask and mechanical layers (free items; w line width, h text height)
Top Overlay:
  circle w0.3: c55,18 r3.25
  circle w0.3: c15,18 r3.25
  region: 11.65,17.75 8.15,16.25 8.15,19.25
  region: 58.635,18.009 62.135,19.509 62.135,16.509
  text "FPOSINDC V3.0" at 12,37.3 h2.5
  text "+24V" at 0.935,33.289 h1.5 r270
  text "GND" at 0.9,28.5 h1.5 r270
  text "CAN 2" at 1.1,20.8 h1.5 r270
  text "CAN 1" at 1,9.6 h1.5 r270
Bottom Overlay:
  circle w0.3: c55,18 r3.25
  circle w0.3: c15,18.085 r3.25
  text "+24V" at 0.935,30.211 h1.5 r270
  text "GND" at 1.865,28.589 h1.5 r90
  text "CAN 2" at 2,20.9 h1.5 r90
  text "RST" at 68,12.5 h1.5 r270
  text "CAN termination" at 21,9.5 h1.5
  text "CAN 1" at 1,6 h1.5 r270
  text "FPOSINDC V3.0" at 51.1,0.9 h2.5
Top Solder:
  region: 17.428,4.131 17.428,0.829 16.666,0.067 10.824,0.067 10.062,0.829 10.062,4.131
Bottom Solder:
  region: 17.428,4.131 17.428,0.829 16.666,0.067 10.824,0.067 10.062,0.829 10.062,4.131
Mechanical 1:
  the board outline again, w0.15
Mechanical 2:
  the board outline again, w0.15

## Text inside footprints (layer, text, board x,y; h text height)
SW1: Bottom Overlay "ON" at 54.1,41 h0.6 r90
X2: Top Overlay "10" at 64.1,0.8 h0.6; Top Overlay "9" at 64.2,5.8 h0.6; Top Overlay "1" at 56.4,5.7 h0.6; Top Overlay "2" at 56.2,1 h0.6